# Altium PCB WPT Round 2.1 RX Layout.PcbDoc
Units mm, origin at the board's own origin, x right, y up, seen from the top; angles counter-clockwise.
Board outline 107.25 x 80 mm, 4 copper layers (Top Layer, Ground 1, Ground 2, Bottom Layer), stack 0.603 mm thick; 98 components, 38 nets, 226 pads, 196 vias.
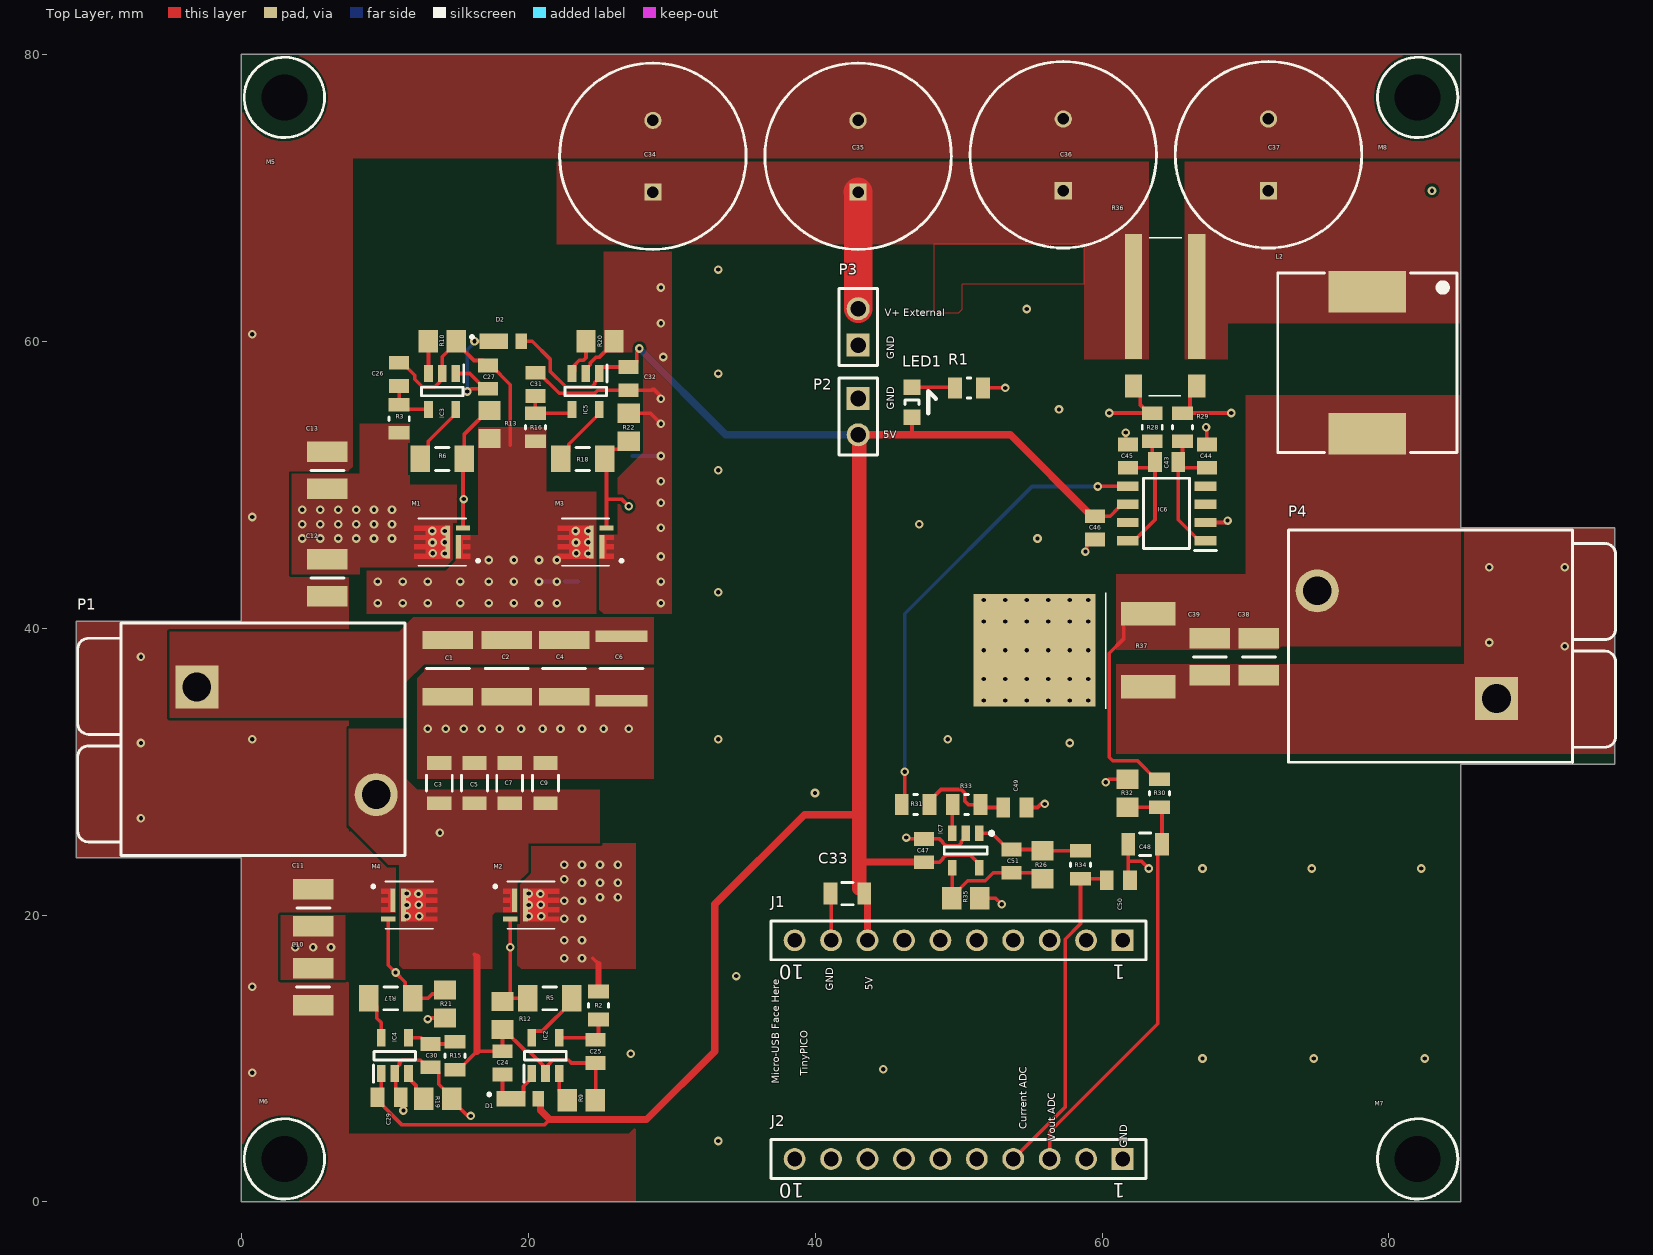
[diagram p0: Top Layer view]
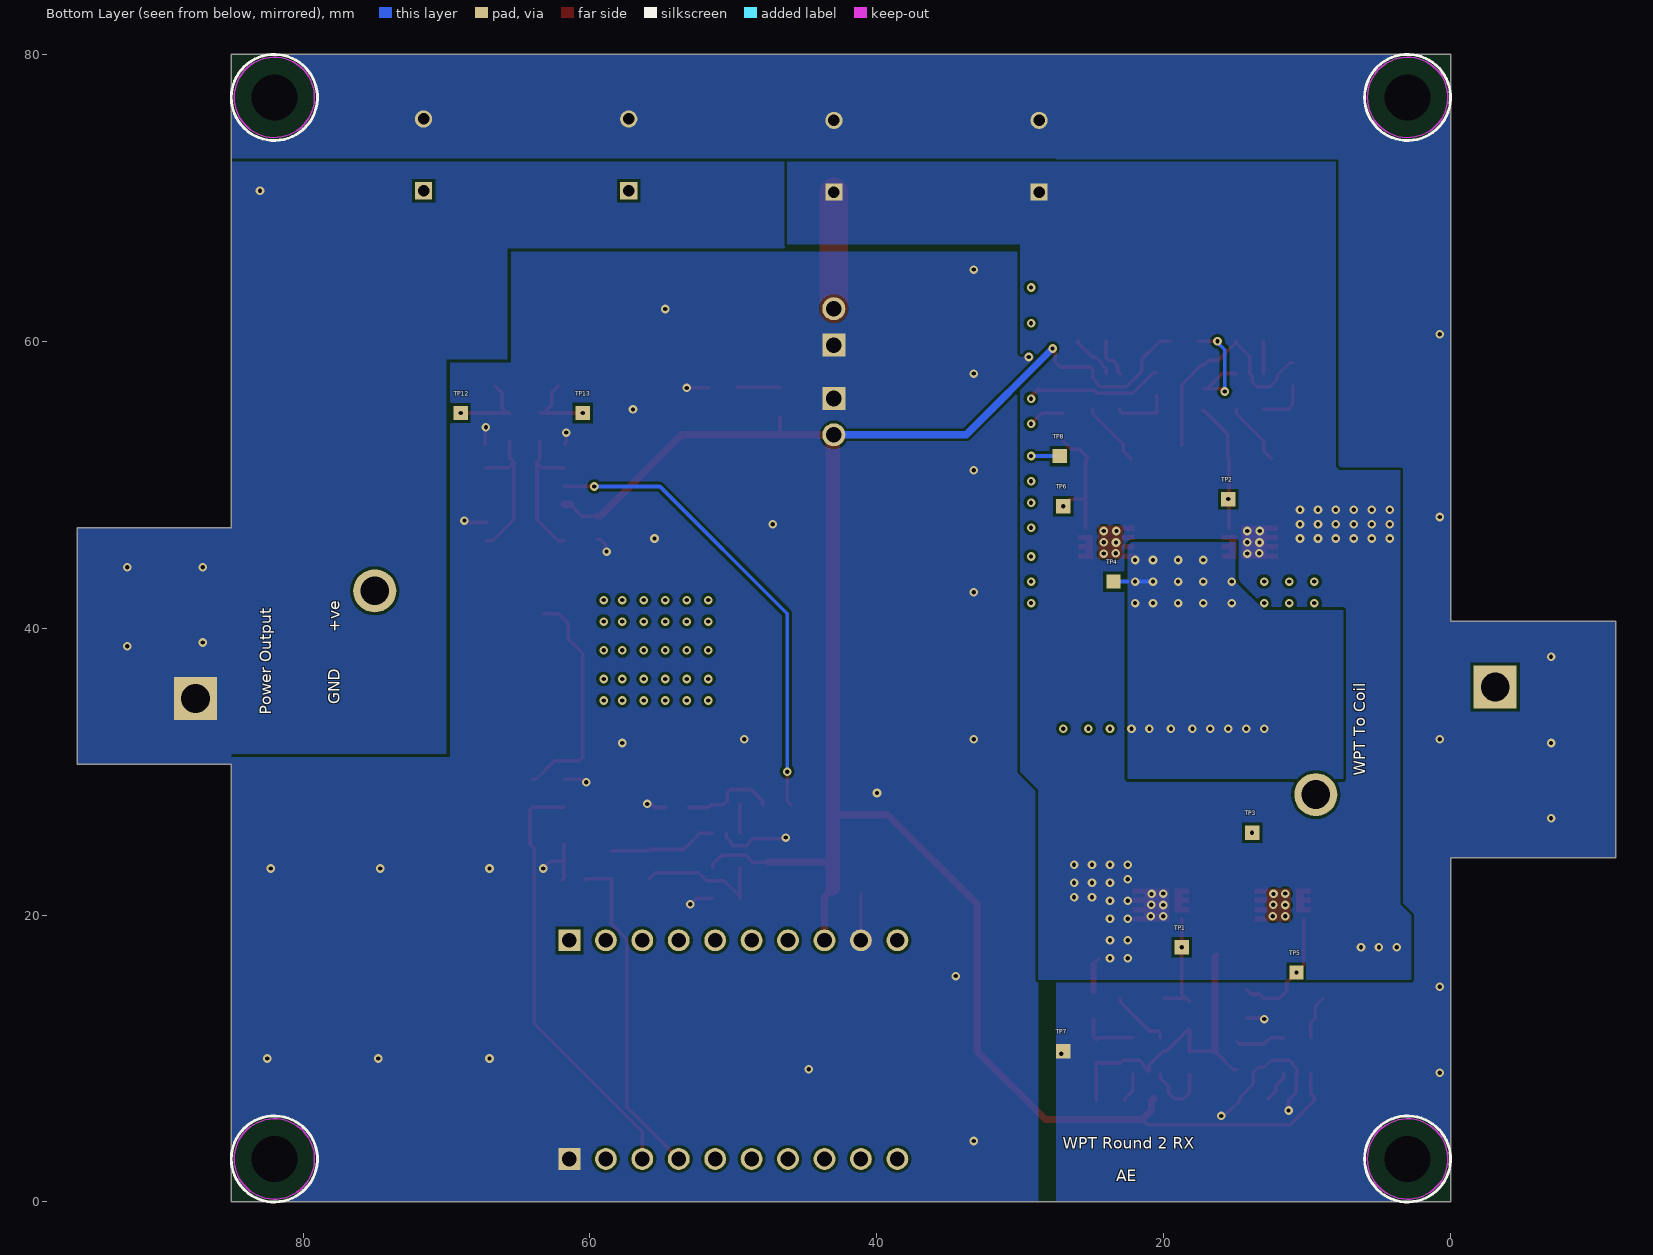
[diagram p1: Bottom Layer view, seen from below]
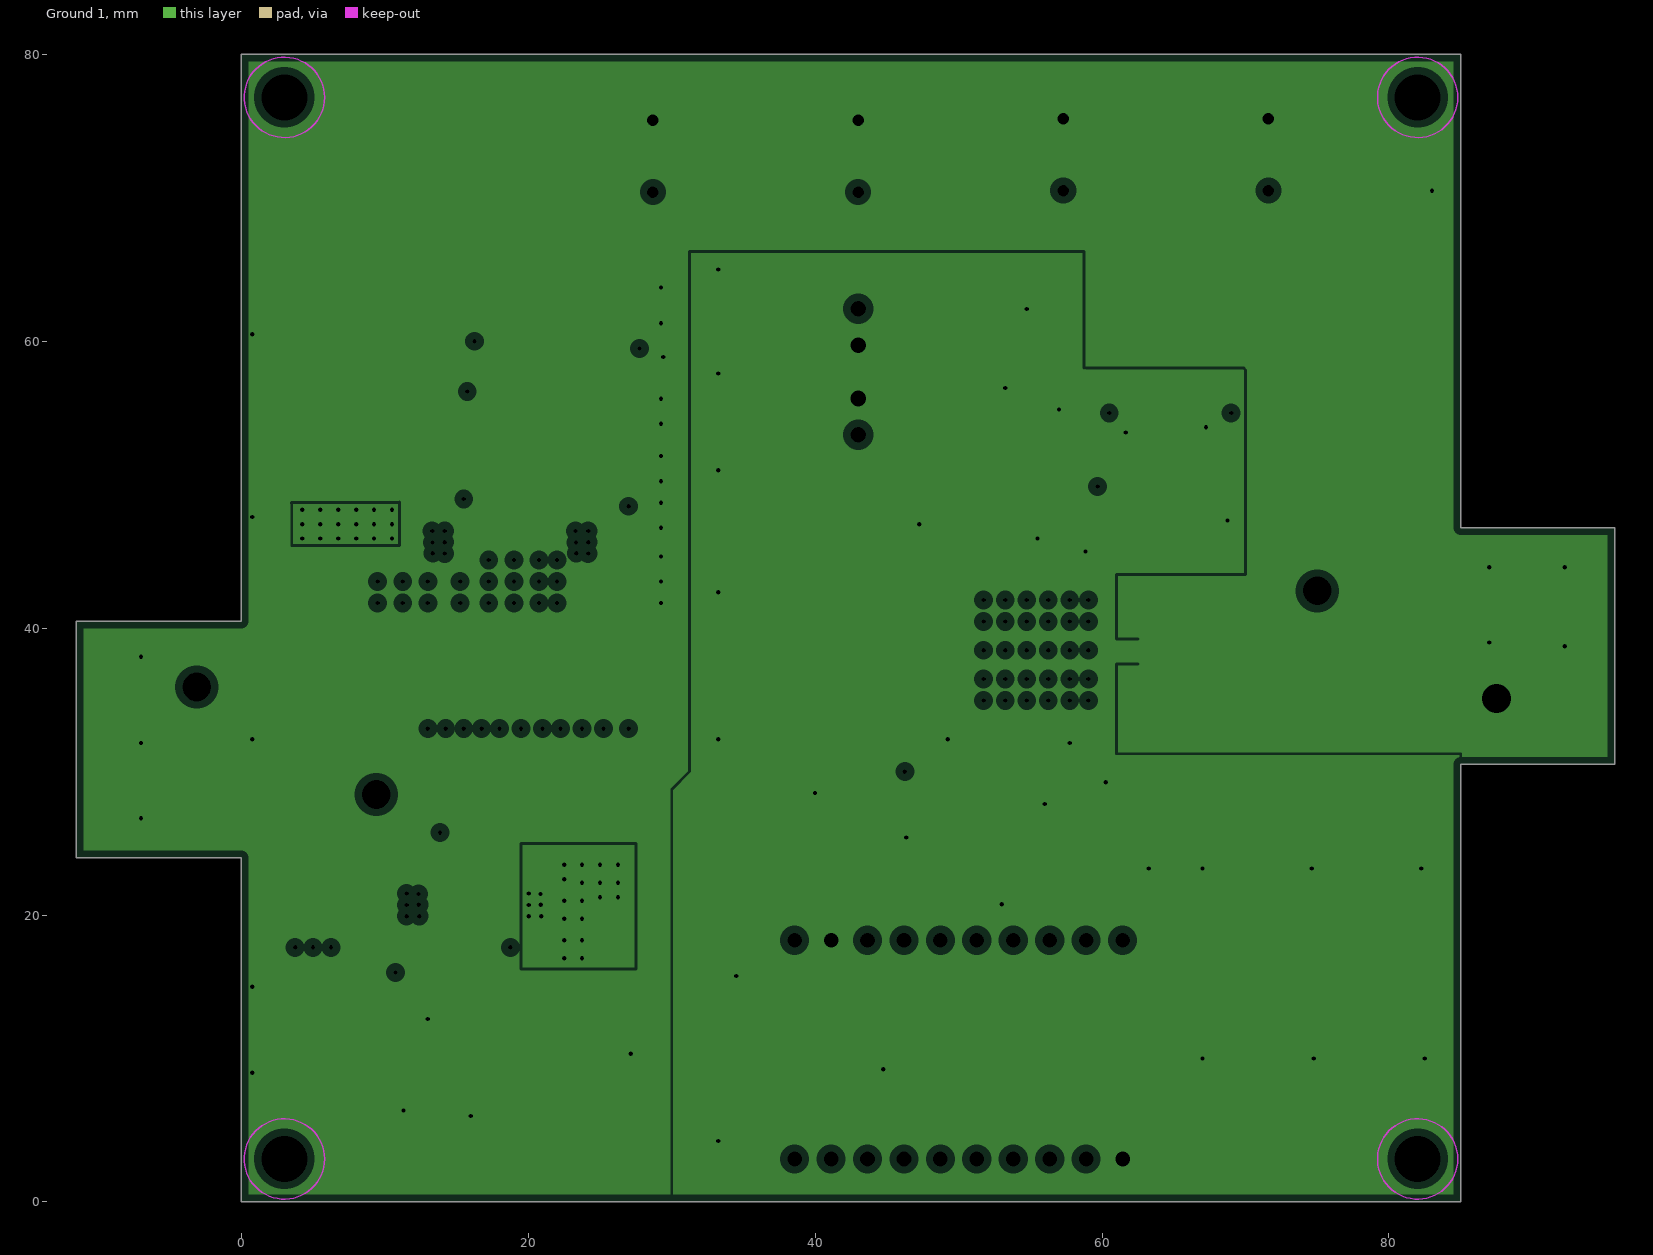
[diagram p2: Ground 1, clearances drawn from the general rule]
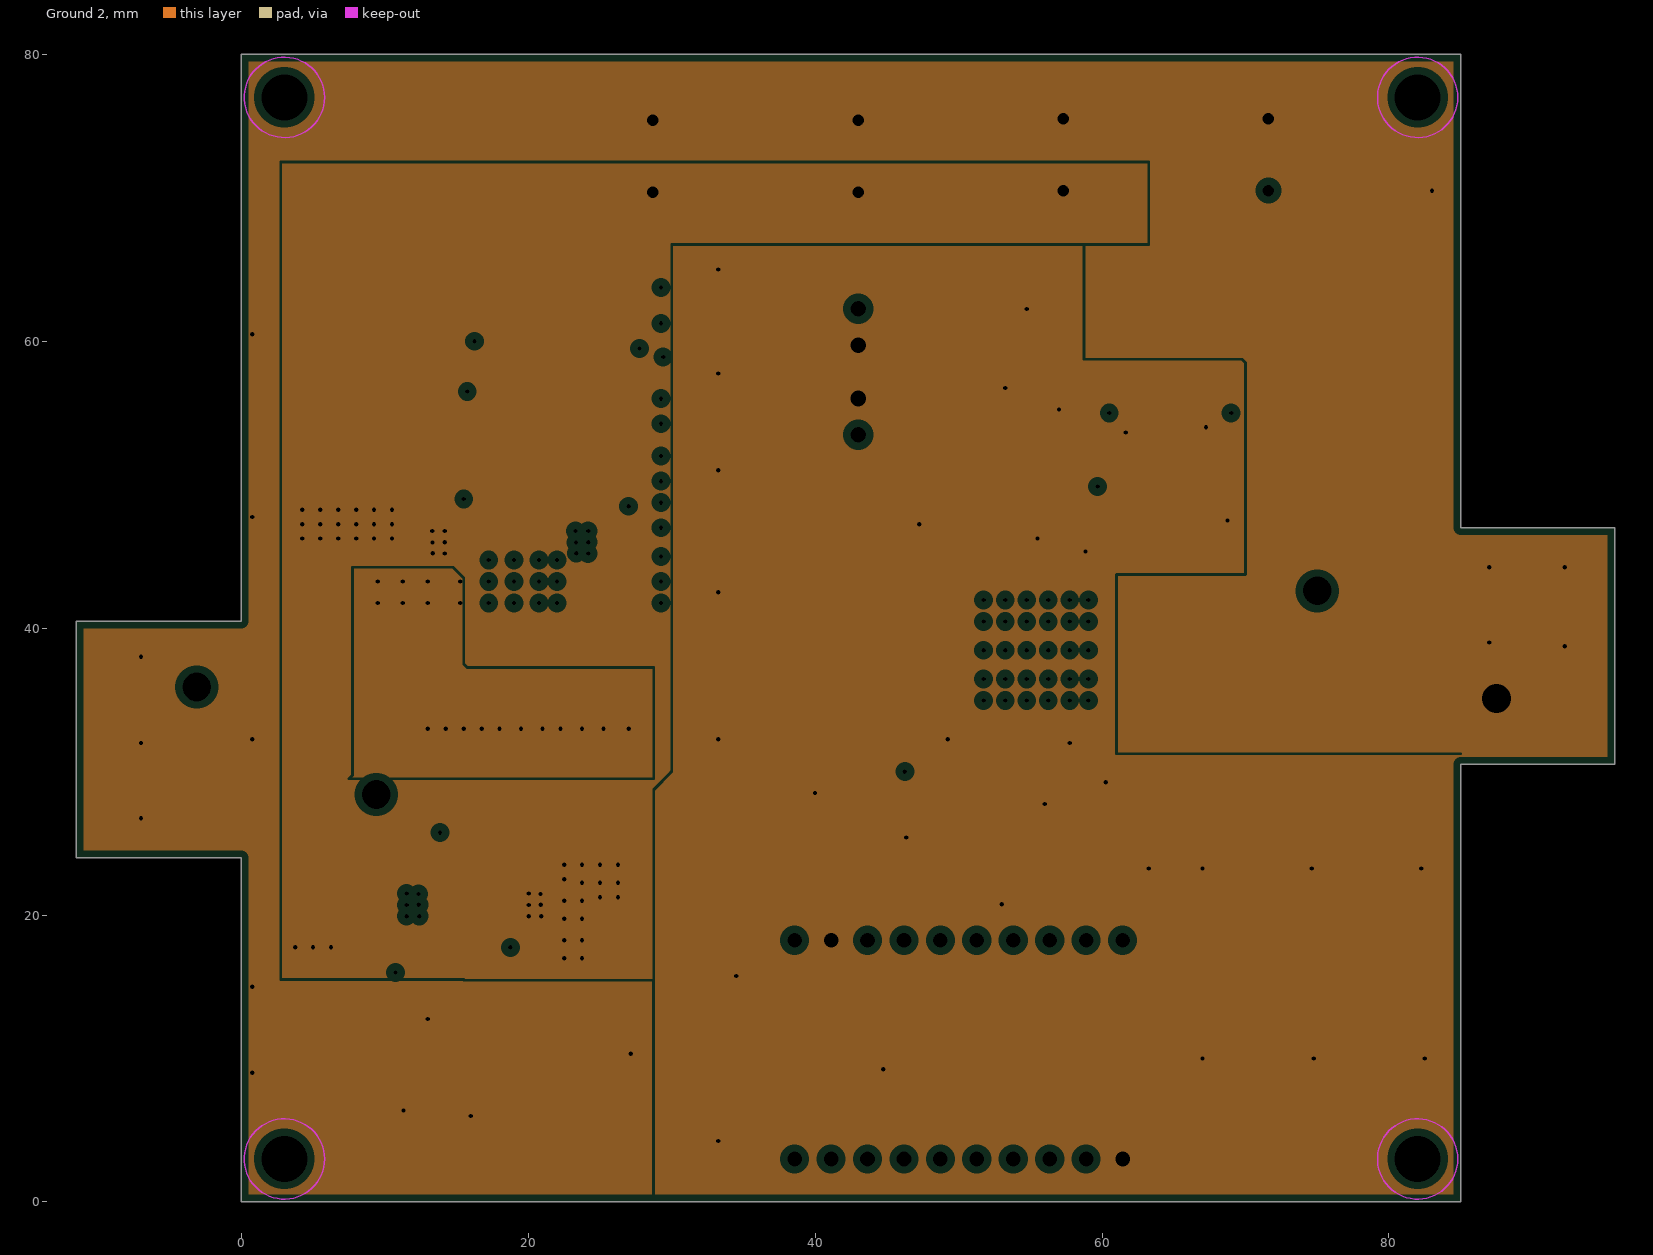
[diagram p3: Ground 2, clearances drawn from the general rule]
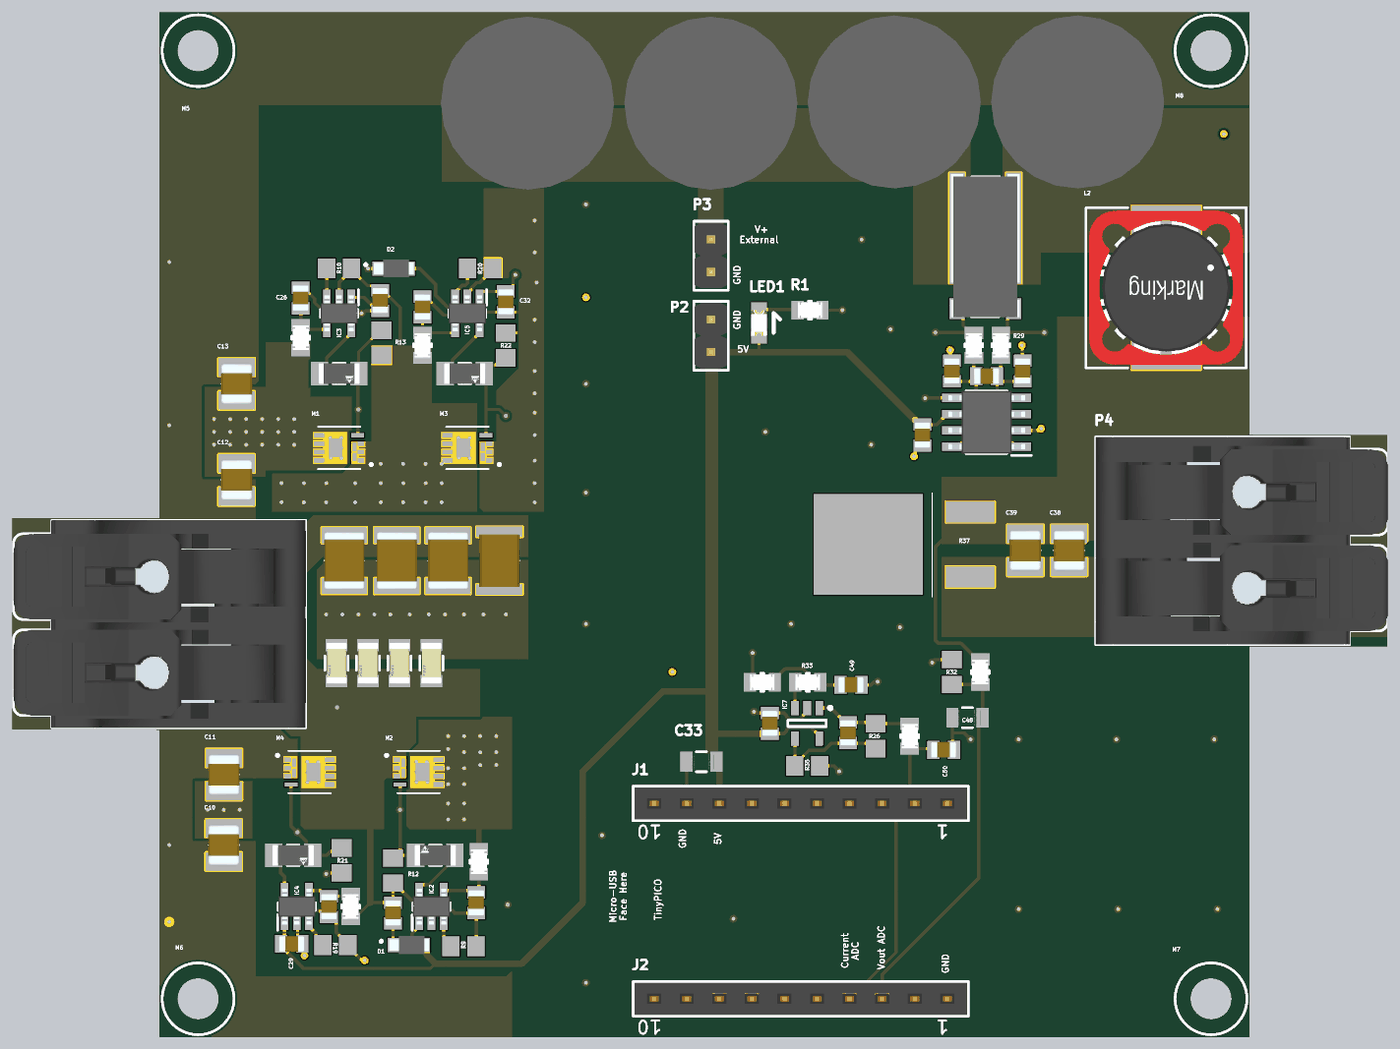
[diagram p4: 3D render of the assembled board from above, using the file's embedded part models]

## Layer stack, top to bottom
Top Solder: solder mask 0.0102, Solder Resist, Dk 3.5
Top Layer: signal copper 0.0356
Dielectric 2: prepreg 0.0711, PP-006, Dk 4.1
Ground 1: plane copper 0.035, net (Multiple Nets)
Dielectric 1: dielectric 0.32, FR-4, Dk 4.8
Ground 2: plane copper 0.035, net (Multiple Nets)
Dielectric 3: prepreg 0.0711, PP-006, Dk 4.1
Bottom Layer: signal copper 0.0356
Bottom Solder: solder mask 0.0102, Solder Resist, Dk 3.5

## Board outline
0,40.5 -11.5,40.5 -11.5,24 0,24 0,0 85,0 85,30.5 95.75,30.5 95.75,47 85,47 85,80 0,80

## Design rules (kind name [scope] priority, off if disabled: settings)
Clearance [All] p1: gap=0.2 ignorepadtopadclearanceinfootprint=TRUE
Height [All] p1: minheight=0 maxheight=50 prefheight=12.7
HoleSize [All] p1: absolutevalues=TRUE maxlimit=10 minlimit=0.025 maxpercent=80.000 minpercent=20.000
MinimumSolderMaskSliver [All] p1: minsoldermaskwidth=0.1
PlaneClearance [All] p1: clearance=0.508
PlaneConnect [All] p1: planeconnectstyle=Direct reliefexpansion=0.508 reliefentries=4 reliefconductorwidth=0.254 reliefairgap=0.254
PolygonConnect [All] p1: connectstyle=Direct reliefconductorwidth=0.254 reliefentries=4 polygonreliefangle="90 Angle" airgapwidth=0.254
RoutingVias [All] p1: holewidth=0.3 width=0.6 viastyle="Through Hole" minholewidth=0.05 minwidth=0.1 maxholewidth=0.711 maxwidth=1.27
SilkToSilkClearance [All] p1: silktosilkclearance=0.1
SilkToSolderMaskClearance [IsPad] p1: minsilkscreentomaskgap=0.1 clearancetoexposedcopper=TRUE
SolderMaskExpansion [All] p1: expansion=0.102 istentingtop=FALSE
Width [All] p1: maxlimit=10 minlimit=0.254 preferedwidth=0.254
23 further rules are at their usual default settings.

## Components (designator, comment, footprint, x,y, rotation, side; value= is the part's Value field where it differs from the comment)
C1 "100nF/250V" CAPC4532X220N 14.4,37.2 r270 top
C2 "100nF/250V" CAPC4532X220N 18.5,37.2 r270 top
C3 "470pF/200V" FP-C1206C-EB-MFG 13.8,29.2 r90 top value="470 pF"
C4 "100nF/250V" CAPC4532X220N 22.5,37.2 r270 top
C5 "470pF/200V" FP-C1206C-EB-MFG 16.254,29.2 r90 top value="470 pF"
C6 "47nF/250V" CAPC4532X350N 26.5,37.2 r270 top
C7 "470pF/200V" FP-C1206C-EB-MFG 18.709,29.2 r90 top value="470 pF"
C9 "470pF/200V" FP-C1206C-EB-MFG 21.2,29.2 r90 top value="470 pF"
C10 "4.7uF/100VDC" CAPC3225X280N 5,15 r90 top
C11 "4.7uF/100VDC" CAPC3225X280N 5.02,20.5 r270 top
C12 "4.7uF/100VDC" CAPC3225X280N 6,43.5 r90 top
C13 "4.7uF/100VDC" CAPC3225X280N 6,51 r270 top
C24 "100nF/50V" CAPC2012X90N 18.2,9.7 r270 top
C25 "100pF" CAPC2012X70N 24.7,10.5 r90 top
C26 "100pF" CAPC2012X70N 11,57.7 r270 top
C27 "100nF/50V" CAPC2012X90N 17.2,57.5 r270 top
C29 "100nF/50V" CAPC2012X90N 10.3,7.3 r180 top
C30 "100pF" CAPC2012X70N 13.2,10.2 r90 top
C31 "100pF" CAPC2012X70N 20.5,57 r270 top
C32 "100nF/50V" CAPC2012X90N 27,57.4 r90 top
C33 "10nF/50V" "0805 Capacitor" 42.25,21.5 r0 top
C34 "1000uF/50V" CAPPRD500W62D1300H2650 28.687,70.4 r90 top
C35 "1000uF/50V" CAPPRD500W62D1300H2650 42.991,70.4 r90 top
C36 "1000uF/50V" CAPPRD500W62D1300H2650 57.296,70.5 r90 top
C37 "1000uF/50V" CAPPRD500W62D1300H2650 71.6,70.5 r90 top
C38 "4.7uF/50V" CAPC3225X280N 70.936,38 r90 top
C39 "4.7uF/50V" CAPC3225X280N 67.511,38 r90 top
C43 "1nF/50V" CAPC2012X90N 64.5,51.6 r180 top
C44 "1nF/50V" CAPC2012X90N 67.3,52 r270 top
C45 "1nF/50V" CAPC2012X90N 61.8,52 r270 top
C46 "100nF/50V" CAPC2012X90N 59.5,47 r90 top
C47 "100nF/50V" CAPC2012X90N 47.596,24.5 r270 top
C48 "10nF/50V" "0805 Capacitor" 63,24.938 r0 top
C49 "1nF/50V" CAPC2012X90N 53.924,27.5 r180 top
C50 "1nF/50V" CAPC2012X90N 61.144,22.43 r180 top
C51 "33pF/50V" CAPC2012X90N 53.679,23.76 r90 top
D1 "Schottky Diode" RB400VAM50TR 18.8,7.2 r270 top
D2 "Schottky Diode" RB400VAM50TR 17.6,60 r270 top
IC2 "Gate Drive" SOT95P280X145-5N 21.2,10.2 r90 top
IC3 "Gate Drive" SOT95P280X145-5N 14,56.5 r270 top
IC4 "Gate Drive" SOT95P280X145-5N 10.7,10.2 r90 top
IC5 "Gate Drive" SOT95P280X145-5N 24,56.5 r270 top
IC6 "Amplifier" SOIC127P600X175-8N 64.5,48 r180 top
IC7 "Op-Amp" ADI-RJ-5_N 50.5,24.5 r270 top
J1 "61301011821" 61301011821 50,18.24 r180 top
J2 "61301011821" 61301011821 50,3 r180 top
L2 "10A" WE-PF_1280 78.5,58.5 r180 top
LED1 "Green LED" 0805_A 46.75,55.75 r270 top
M1 "Mosfet" TRANS_BSZ037N06LS5ATMA1 14,46 r180 top
M2 "Mosfet" TRANS_BSZ037N06LS5ATMA1 20.2,20.7 r0 top
M3 "Mosfet" TRANS_BSZ037N06LS5ATMA1 24,46 r180 top
M4 "Mosfet" TRANS_BSZ037N06LS5ATMA1 11.7,20.7 r0 top
M5 "M3 Mounting Hole" "M3 Hole" 3,77 r0 top
M6 "M3 Mounting Hole" "M3 Hole" 3,3 r0 top
M7 "M3 Mounting Hole" "M3 Hole" 82,3 r0 top
M8 "M3 Mounting Hole" "M3 Hole" 82,77 r0 top
P1 "To Coil" 691404910002B 0,32.25 r270 top
P2 "61300211121" 61300211121 43,54.75 r270 top
P3 "61300211121" 61300211121 43,61 r90 top
P4 "System Output" 691404910002B 84.4,38.75 r90 top
R1 "1K0O" FP-CRCW0805-e3-MFG 50.725,56.75 r0 top
R2 "1K" FP-CRCW0805-e3-MFG 24.9,13.7 r90 top
R3 "1K" FP-CRCW0805-e3-MFG 11,54.6 r270 top
R5 "10R" FP-CRCW1206-e3-IPC_A 21.5,14.2 r180 top
R6 "10R" FP-CRCW1206-e3-IPC_A 14,51.8 r0 top
R9 "10k Ohm" "0805 RESISTOR" 23.7,7.1 r180 top
R10 "10k Ohm" "0805 RESISTOR" 14,60 r180 top
R12 "10k Ohm" "0805 RESISTOR" 18.2,13 r270 top
R13 "10k Ohm" "0805 RESISTOR" 17.3,54.2 r270 top
R15 "1K" FP-CRCW0805-e3-MFG 14.9,10.2 r270 top
R16 "1K" FP-CRCW0805-e3-MFG 20.5,54 r270 top
R17 "10R" FP-CRCW1206-e3-IPC_A 10.417,14.2 r0 top
R18 "10R" FP-CRCW1206-e3-IPC_A 23.8,51.8 r0 top
R19 "10k Ohm" "0805 RESISTOR" 13.7,7.2 r180 top
R20 "10k Ohm" "0805 RESISTOR" 25,60 r180 top
R21 "10k Ohm" "0805 RESISTOR" 14.2,13.8 r270 top
R22 "10k Ohm" "0805 RESISTOR" 27,54 r90 top
R26 "15K" "0805 Resistor" 55.85,23.5 r90 top
R28 "470R" FP-CRCW0805-e3-MFG 63.5,54 r90 top
R29 "470R" FP-CRCW0805-e3-MFG 65.604,54 r90 top
R30 "1M ohm" FP-CRCW0805-e3-MFG 64,28.5 r90 top
R31 "1K" FP-CRCW0805-e3-MFG 47,27.704 r180 top
R32 "56K" "0805 RESISTOR" 61.78,28.5 r270 top
R33 "6K8R" FP-CRCW0805-e3-MFG 50.554,27.704 r0 top
R34 "100R" FP-CRCW0805-e3-MFG 58.5,23.5 r90 top
R35 "10k Ohm" "0805 RESISTOR" 50.5,21.18 r0 top
R36 "0R005 5W" FC4L110R005FER 64.4,60 r180 top
R37 "300 Ohm / 25W" PWR163S253000FE 59.247,38.46 r90 top
TP1 "TP" "Test Point" 18.75,17.75 r180 bottom
TP2 "TP" "Test Point" 15.5,49 r180 bottom
TP3 "TP" "Test Point" 13.842,25.746 r180 bottom
TP4 "TP" "Test Point" 23.5,43.25 r180 bottom
TP5 "TP" "Test Point" 10.75,16 r180 bottom
TP6 "TP" "Test Point" 27,48.5 r180 bottom
TP7 "TP" "Test Point" 27,10.5 r180 bottom
TP8 "TP" "Test Point" 27.25,52 r180 bottom
TP12 "TP" "Test Point" 69,55 r90 bottom
TP13 "TP" "Test Point" 60.5,55 r90 bottom

## Footprints (in the part's own frame and the unit in brackets; to place one, negate y for a bottom-side part, rotate by r counter-clockwise, add the part's x,y. Pads: shape width x height; smd on the part's side, far side on the other; paste and mask are expansions set on the pad)
"0805 Capacitor" [mm]
  rect 0.956x1.556 smd paste+0 mask+0: 1(-1.175,0) 2(1.175,0)
  silkscreen extent -0.4,-0.78 0.4,0.78, body extent -2.15,-1.28 2.15,1.28, height 0.25
"0805 RESISTOR" [mm] "Chip Resistor, 2-Leads, Body 2.00x1.25mm, IPC Low Density"
  rect 1.35x1.55 smd: 1(-0.975,0) 2(0.975,0)
  body extent -1.1,-0.72 1.1,0.72, height 0.7
"0805 Resistor" [mm] "Chip Resistor, 2-Leads, Body 2.00x1.25mm, IPC Low Density"
  rect 1.35x1.55 smd: 1(-0.975,0) 2(0.975,0)
  body extent -1.1,-0.72 1.1,0.72, height 0.7
0805_A [mm] "Chip LED, 2-Leads, Body 2.0x1.3mm, IPC Medium Density"
  rect 1.1x1.2 smd: 1(-1.05,0) 2(1.05,0)
  silkscreen extent -0.76,-0.5 0.76,1.65, body extent -1,-0.62 1,0.63, height 0.68
61300211121 [mm] "Pin Header, pitch 2.54 mm, THT, Vertical, single row, 2p"
  rect 1.6x1.6 hole 1.1: 1(-1.27,0)
  round 1.6 hole 1.1: 2(1.27,0)
  silkscreen extent -2.69,-1.35 2.69,1.35, body extent -2.54,-1.27 2.54,1.27, height 8.57
61301011821 [mm] "Socket Header, Pitch 2.54 mm, THT, Vertical, single row, 10p"
  rect 1.52x1.52 hole 1.02: 1(-11.43,0)
  round 1.52 hole 1.02: 2(-8.89,0) 3(-6.35,0) 4(-3.81,0) 5(-1.27,0) 6(1.27,0) 7(3.81,0) 8(6.35,0) 9(8.89,0) 10(11.43,0)
  silkscreen extent -13.08,-1.35 13.08,1.35, body extent -12.95,-1.25 12.95,1.25, height 8.55
691404910002B [mm] "7.50 mm Screwless Clamp Power Connector, 2p"
  rect 3x3 hole 2: 1(-3.65,-3.1)
  round 3 hole 2: 2(3.85,9.4)
  silkscreen extent -8.1,-11.4 8.1,11.4, body extent -8.1,-11.4 8.1,11.4, height 24.16
ADI-RJ-5_N [mm] "SOT-23, 5-Leads, Body 2.9x1.6mm, Pitch 0.95mm, IPC Medium Density"
  rect 1.1x0.6 smd: 1(-1.2,0.95) 2(-1.2,0) 3(-1.2,-0.95) 4(1.2,-0.95) 5(1.2,0.95)
  silkscreen extent -1.32,-1.5 0.25,1.93, body extent -0.85,-1.5 0.85,1.5, height 1.45
CAPC2012X70N [mm]
  rect 0.96x1.39 smd: 1(-0.81,0) 2(0.81,0)
  body extent -1,-0.63 1,0.63, height 0.7
CAPC2012X90N [mm]
  rect 0.96x1.39 smd: 1(-0.81,0) 2(0.81,0)
  body extent -1,-0.63 1,0.63, height 0.9
CAPC3225X280N [mm]
  rect 1.43x2.82 smd: 1(-1.29,0) 2(1.29,0)
  silkscreen extent 0,-1.15 0,1.15, body extent -1.6,-1.25 1.6,1.25, height 2.8
CAPC4532X220N [mm]
  rect 1.25x3.52 smd: 1(-1.98,0) 2(1.98,0)
  silkscreen extent 0,-1.5 0,1.5, body extent -2.25,-1.6 2.25,1.6, height 2.2
CAPC4532X350N [mm]
  rect 0.81x3.61 smd: 1(-2.25,0) 2(2.25,0)
  silkscreen extent 0,-1.5 0,1.5, body extent -2.05,-1.57 2.05,1.57, height 3.46
CAPPRD500W62D1300H2650 [mm]
  rect 1.2x1.2 hole 0.8: 1(0,0)
  round 1.2 hole 0.8: 2(5,0)
  silkscreen extent -4,-6.5 9,6.5, body extent -4.25,-6.75 9.25,6.75, height 26.5
FC4L110R005FER [mm]
  rect 1.2x8.7 smd: 1(-2.2,-3.125) 2(2.2,-3.125)
  rect 1.2x1.6 smd: 3(2.2,3.125) 4(-2.2,3.125)
  silkscreen extent -1.15,-7.2 1.15,3.8, body extent -2.68,-7.35 2.68,3.8, height 0.8
FP-C1206C-EB-MFG [mm]
  rect 0.95x1.7 smd paste+0 mask+0: 1(-1.4,0) 2(1.4,0)
  silkscreen extent -0.55,-0.9 0.55,0.9, body extent -2,-1 2,1, height 0.25
FP-CRCW0805-e3-MFG [mm]
  rect 0.95x1.45 smd paste+0 mask+0: 1(-0.975,0) 2(0.975,0)
  silkscreen extent -0.13,-0.7 0.13,0.7, body extent -1.55,-0.82 1.55,0.82, height 0.25
FP-CRCW1206-e3-IPC_A [mm]
  rect 1.356x1.858 smd paste+0 mask+0: 1(-1.526,0) 2(1.526,0)
  silkscreen extent -0.47,-0.8 0.47,0.8, body extent -2.7,-1.43 2.7,1.43, height 0.25
"M3 Hole" [mm]
  round 0 hole 3.2 unplated mask+0.1: 1(0,0)
  Keep-Out Layer circle w0.1: c0,0 r2.8
  silkscreen extent -2.8,-2.8 2.8,2.8
PWR163S253000FE [mm]
  rect 1.62x3.81 smd: 1(-2.54,-3.97) 2(2.54,-3.97)
  rect 7.87x8.51 smd: 3(0,3.97)
  silkscreen extent -4.07,-1 4,-1
RB400VAM50TR [mm]
  rect 1.1x2 smd: 1(0,0)
  rect 1.1x0.8 smd: 2(0,1.9)
  silkscreen extent -0.4,-1.62 -0.2,-1.43, body extent -0.7,-0.89 0.7,2.22, height 0.9
SOIC127P600X175-8N [mm]
  rect 1.525x0.65 smd: 1(-2.712,1.905) 2(-2.712,0.635) 3(-2.712,-0.635) 4(-2.712,-1.905) 5(2.712,-1.905) 6(2.712,-0.635) 7(2.712,0.635) 8(2.712,1.905)
  silkscreen extent -3.47,-2.45 1.6,2.58, body extent -3,-2.45 3,2.45, height 1.75
SOT95P280X145-5N [mm]
  rect 1.2x0.6 smd: 1(-1.25,0.95) 2(-1.25,0) 3(-1.25,-0.95) 4(1.25,-0.95) 5(1.25,0.95)
  silkscreen extent -1.85,-1.45 0.3,1.5, body extent -1.4,-1.45 1.4,1.45, height 1.45
"Test Point" [mm]
  rect 1x1 smd: 1(0,0)
TRANS_BSZ037N06LS5ATMA1 [mm]
  rect 0.34x1.64 smd paste-2 mask+0: 1-2-3(-1.15,0.325)
  rect 1x0.34 smd: 4(-1.45,-0.975)
  rect 0.34x2.29 smd paste-2 mask+0: 5-6-7-8(-0.39,0)
  Top Layer region: 1.95,0.805 1.15,0.805 1.15,0.495 1.95,0.495 1.95,0.155 1.15,0.155 1.15,-0.155 1.95,-0.155 1.95,-0.495 1.15,-0.495 1.15,-0.805 1.95,-0.805 1.95,-1.145 -0.56,-1.145 -0.56,1.145 1.95,1.145
  Top Layer region: -0.95,-0.495 -1.95,-0.495 -1.95,-0.155 -1.45,-0.155 -1.45,0.155 -1.95,0.155 -1.95,0.495 -1.45,0.495 -1.45,0.805 -1.95,0.805 -1.95,1.145 -0.95,1.145
  silkscreen extent -2.6,-1.65 1.65,1.65
WE-PF_1280 [mm] "SMD EMI Suppression Power  Ferrite, body 12x12mm"
  rect 5.4x2.9 smd: 1(0,-4.95) 2(0,4.95)
  silkscreen extent -6.25,-6.25 6.25,6.25, body extent -6,-6 6,6, height 8

## Part data
C1 C2 C4: library part C1812C104JAGACAUTO, Manufacturer_Name=Kemet, Supplier Part Number 1=80-C1812C104JAGAUTO, Datasheet Link=https://api.kemet.com/component-edge/download/datasheet/C1812C104JAGACAUTO.pdf, Height=2.2mm, Manufacturer_Part_Number=C1812C104JAGACAUTO, Supplier 1=Mouser
C3 C5 C7 C9: library part C1206C471K2GACTU, "CAP CER 470PF 200V 10% NP0 1206", Capacitance="470 pF", Manufacturer=KEMET, Package=C1206C-EB, Temperature="-55°C to +150°C", Temperature Characteristic=C0G, Temperature Coefficient=15%, Temperature Range High=+150°C, Temperature Range Low=-55°C, Tolerance=0.1, Voltage Rating="200 V", Automotive=Yes, Automotive Grade="Grade 0", Category=Cap, ComponentLink2Description=Datasheet, ComponentLink2URL=https://content.kemet.com/datasheets/KEM_C1007_X8R_ULTRA_150C_SMD.pdf, Device Class L1="Passive Components", Device Class L2=Capacitors, Device Class L3="Ceramic Capacitors", Digikey Description="CAP CER 470PF 200V 10% NP0 1206", Height=0.88mm, Ipc Land Pattern Name=CAPC320160X78, Lead Free=Yes, Manufacturer Part Number=C1206C471K2GACTU, Material=Ceramic, Mouser Description="Multilayer Ceramic Capacitors MLCC - SMD/SMT 200volts 470pF C0G 10%", Octopart=https://octopart.com/c1206c471k2gactu-kemet-3658280, RoHS=TRUE
C6: library part C4532C0G2E473J320KA, "Capacitor / 47nF/250V  / C0G", Manufacturer_Name=TDK, Supplier Part Number 1=810-C4532C0G2E473J, Datasheet Link=https://product.tdk.com/info/en/catalog/datasheets/mlcc_commercial_midvoltage_en.pdf, Height=3.5mm, Manufacturer_Part_Number=C4532C0G2E473J320KA, Supplier 1=Mouser
C10 C11 C12 C13: library part CNC6P1X7R2A475K250AE, Manufacturer_Name=TDK, Mouser2 Part Number=810-CNC6P1X7R2A475K2, Datasheet Link=https://componentsearchengine.com//CNC6P1X7R2A475K250AE.pdf, Height=2.8mm, Manufacturer_Part_Number=CNC6P1X7R2A475K250AE, Mouser2 Price/Stock=https://www.mouser.com/Search/Refine.aspx?Keyword=810-CNC6P1X7R2A475K2, Supplier 1=Mouser, Supplier Part Number 1=810-CNC6P1X7R2A475K2
C24 C27 C29 C32: library part 885012207098, "Capacitor 100nF/50V", Manufacturer_Name="Wurth Elektronik", Mouser2 Part Number=710-885012207098, Datasheet Link=https://componentsearchengine.com//885012207098.pdf, Height=0.9mm, Manufacturer_Part_Number=885012207098, Mouser2 Price/Stock=https://www.mouser.com/Search/Refine.aspx?Keyword=710-885012207098, Supplier 1=Mouser, Supplier Part Number 1=710-885012207098
C25 C26 C30 C31: library part 885012007057, "Capacitor 100pF", Manufacturer_Name="Wurth Elektronik", Supplier Part Number 1=710-885012007057, Datasheet Link=https://katalog.we-online.com/pbs/datasheet/885012007057.pdf, Height=0.7mm, Manufacturer_Part_Number=885012007057, Supplier 1=Mouser
C33 C48: library part 885012207092, Supplier Part Number 1=710-885012207092, Supplier 1=Mouser
C34 C35 C36 C37: library part ESH108M050AL4AA, "Capacitor 1000uF", Supplier Part Number 1=80-ESH108M050AL4AA, Supplier 1=Mouser
C38 C39: library part 885012209048, "Capacitor 4.7uF/50V", Manufacturer_Name="Wurth Elektronik", Supplier Part Number 1=710-885012209048, Datasheet Link=https://katalog.we-online.com/pbs/datasheet/885012209048.pdf, Height=2.8mm, Manufacturer_Part_Number=885012209048, Supplier 1=Mouser
C43 C44 C45 C49 C50: library part 885012207086, Manufacturer_Name="Wurth Elektronik", Supplier Part Number 1=710-885012207086, Datasheet Link=https://katalog.we-online.com/pbs/datasheet/885012207086.pdf, Height=0.9mm, Manufacturer_Part_Number=885012207086, Supplier 1=Mouser
C46 C47: library part 885012207098, Manufacturer_Name="Wurth Elektronik", Supplier Part Number 1=710-885012207098, Height=0.9mm, Supplier 1=Mouser
C51: library part C0805C330J5GACTU, "Capacitor 33pF/50V", Manufacturer_Name=Kemet, Supplier Part Number 1=80-C0805C330J5G, Manufacturer_Part_Number=C0805C330J5GACTU, Supplier 1=Mouser
D1 D2: library part RB400VAM-50TR, Manufacturer_Name="ROHM Semiconductor", Mouser2 Part Number=755-RB400VAM-50TR, Datasheet Link=https://componentsearchengine.com//RB400VAM-50TR.pdf, Height=0.8mm, Manufacturer_Part_Number=RB400VAM-50TR, Mouser2 Price/Stock=https://www.mouser.com/Search/Refine.aspx?Keyword=755-RB400VAM-50TR, Supplier 1=Mouser, Supplier Part Number 1=755-RB400VAM-50TR
IC2 IC3 IC4 IC5: library part IR1161LTRPBF, "Gate Driver IC", Manufacturer_Name=Infineon, Supplier Part Number 1=942-IR1161LTRPBF, Height=1.45mm, Manufacturer_Part_Number=IR1161LTRPBF, Supplier 1=Mouser
IC6: library part AD8215YRZ, "Integrated Circuit Amplifier", Manufacturer_Name="Analog Devices", Supplier Part Number 1=584-AD8215YRZ, Datasheet Link=http://www.analog.com/static/imported-files/data_sheets/AD8215.pdf, Height=1.75mm, Manufacturer_Part_Number=AD8215YRZ, Supplier 1=Mouser
IC7: library part AD8031ARTZ-REEL7, "Single Channel RRIO Operational Amplifier, 80 MHz BW, 35 V/us SR, Industrial, 5-pin SOT23 (RJ-5), Reel", Amplifiers Per Package=1, Generic Part Number=AD8031, Input Bias Current=450nA, Input Offset Voltage=1mV, Manufacturer="Analog Devices", Supplier Part Number 1=584-AD8031ARTZ-R7, Code_JEDEC=MO-178-AA, ComponentLink1Description="Manufacturer URL", ComponentLink1URL=http://www.analog.com/en/index.html, ComponentLink2Description=Datasheet, ComponentLink2URL=http://www.analog.com/static/imported-files/data_sheets/AD8031_8032.pdf, ComponentLink3Description="Package Specification", ComponentLink3URL=http://www.analog.com/static/imported-files/packages/PKG_PDF/SOT-23(RJ)/RJ_5.pdf, ComponentLink4Description="Reference Circuit", ComponentLink4URL=http://www.analog.com/en/all-operational-amplifiers-op-amps/operational-amplifiers-op-amps/ad8031/products/product.html#product-recommendations, DatasheetVersion="Rev. D", Iq/Amp=900uA, Mounting Technology="Surface Mount", PackageDescription="5-Pin Small Outline Transistor Package, Body 2.9 x 1.6 mm, Pitch 0.95 mm", PackageReference=RJ-5, PackageVersion=121608-A, Packing=Reel, PartNumber=AD8031ARTZ-REEL7, RevisionNote="Reference Circuit URL fixed", Slew Rate=35V/us, Small Signal Bandwidth=80MHz, Supplier 1=Mouser, V Span Max=12V, V Span Min=2.7V
J1 J2: "WR-PHD Socket Header, THT, pitch 2.54mm, Single Row, Vertical, 10p", Contact Resistance=20mOhm, Manufacturer="Wurth Elektronik", Operating Temperature="-40 to +125degC", Rated Current=3A, Withstanding Voltage=500VAC, Working Voltage=250VAC, ComponentLink1Description=Manufacturer, ComponentLink1URL=http://www.we-online.de, ComponentLink2Description=Datasheet, ComponentLink2URL=https://www.we-online.com/catalog/datasheet/61301011821.pdf, Gender="Socket Header", Manufacturer Part Number=61301011821, Mounting Technology=THT, Orientation=Vertical, Packaging=Tray, Pin Number=10, Pitch=2.54mm, Published Date="May 2020", Row Number=Single
L2: library part 742792901, "SMD EMI Suppression Power Ferrite WE-PF, Z = 2900 Ohm", Supplier Part Number 1=710-742792901, ComponentLink1Description="Manufacturer Link", ComponentLink1URL=http://www.we-online.com, ComponentLink2Description=Datasheet, ComponentLink2URL=http://www.we-online.de/katalog/media/pdf/742792901.pdf, DatasheetVersion="ver 6, Apr-2007", Impedance="2900 Ohm", PackageDescription="Inductor, 2-Leads, Body 12.0 x 12.0 mm", PackageReference=WE-PF, PackageVersion=2007, Supplier 1=Mouser
LED1: library part 150080GS75000, "SMD mono-color Chip LED, WL-SMCW, Green", Color=Green, Manufacturer="Wuerth Elektronik", Supplier Part Number 1=710-150080GS75000, ComponentLink1Description="Manufacturer URL", ComponentLink1URL=http://www.we-online.com, ComponentLink2Description=Datasheet, ComponentLink2URL=http://katalog.we-online.com/led/datasheet/150080GS75000.pdf, PackageReference=0805_A, PartNumber=150080GS75000, Supplier 1=Mouser
M1 M2 M3 M4: library part BSZ070N08LS5ATMA1, "Further performance improvements with best-in-class OptiMOSâ„¢ 5 60V power MOSFET in high performance PQFN 3.3x3.3mm package / MOSFET Diode", Package="TSDSON-8 Infineon Technologies", Supplier Part Number 1=726-BSZ070N08LS5ATMA, Availability=Unavailable, MF="Infineon Technologies", MP=BSZ037N06LS5ATMA1, Price=None, SnapEDA_Link=https://www.snapeda.com/parts/BSZ037N06LS5ATMA1/Infineon%20Technologies/view-part/4422719/?ref=snap, Supplier 1=Mouser
M5 M6 M7 M8: library part M3_Mounting_hole
P1 P4: library part 691404910002B, "Serie 4049 B - 7.50mm Screwless Clamp Power Connector WR-TBL, 2 pin", Manufacturer="Wurth Elektronik", Operating Temperature=-40to105degC, Supplier Part Number 1=710-691404910002B, Datasheet URL=http://katalog.we-online.de/em/datasheet/6914049100xxB.pdf, Manufacturer URL=http://www.we-online.de, Mounting Technology=THT, Package Reference=691404910002B, Packaging=Box, Part Number=691404910002B, Pin Number=2, Pitch=7.50mm, Publisher=WurthElektronik, Supplier 1=Mouser
P2 P3: "WR-PHD Pin Header, THT, pitch 2.54mm, Single Row, Vertical, 2p", Contact Resistance=20mOhm, Manufacturer="Wurth Elektronik", Operating Temperature="-40 to +105degC", Rated Current=3A, Withstanding Voltage=500VAC, Working Voltage=250VAC, ComponentLink1Description=Manufacturer, ComponentLink1URL=http://www.we-online.de, ComponentLink2Description=Datasheet, ComponentLink2URL=https://www.we-online.com/catalog/datasheet/61300211121.pdf, Gender="Pin Header", Manufacturer Part Number=61300211121, Mounting Technology=THT, Orientation=Vertical, Packaging=Bag, Pin Number=2, Pitch=2.54mm, Published Date="May 2020", Row Number=Single
R1: library part CRCW08051K00FKEAC, "Resistor 1K0 Ohm", Supplier Part Number 1=71-CRCW0805-1.0K-E3, Number of Terminations=2, Supplier 1=Mouser
R2 R3 R15 R16 R31: library part CRCW08051K00FKEA, "Resistor 1k Ohm", Supplier Part Number 1=71-CRCW0805-1.0K-E3, Number of Terminations=2, Supplier 1=Mouser
R5 R6 R17 R18: library part CRCW120610R0FKEA, "RES Thick Film, 10Ω, 1%, 0.25W, 100ppm/°C, 1206 / MOSFET Gate Resistor 10Ohm", Case Code (Imperial)=1206, Case Code (Metric)=3216, Max Operating Temperature=155°C, Max Power Dissipation=250mW, Min Operating Temperature=-55°C, Package Quantity=10, Supplier Part Number 1=541-10.0FDKR-ND, Temperature Coefficient=100ppm/°C, Tolerance=1%, Voltage Rating=200V, Case/Package=1206, Composition="Thick Film", Contact Plating=Tin, Depth=1.6mm, Features="Automotive AEC-Q200", Height=0.55mm, Lead Free="Lead Free", Length=3.2mm, Military Standard=Not, Number of Pins=2, Number of Terminations=2, Packaging="Tape and Reel", Power Rating=250mW, Radiation Hardening=No, Resistance=10R, Supplier 1=Digi-Key, Termination=SMD/SMT, Voltage Rating (DC)=200V, Weight=0.000353oz, Width=0.063inch
R9 R10 R12 R13 R19 R20 R21 R22 R35: library part CRCW080510K0FKEA, "RES Thick Film, 10kΩ, 1%, 0.125W, 100ppm/°C, 0805 / 10k Ohm", Case Code (Imperial)=0805, Case Code (Metric)=2012, Max Operating Temperature=155°C, Min Operating Temperature=-55°C, Package Quantity=5000, Power Rating=125mW, Resistance=10kR, Supplier Part Number 1=71-CRCW0805-10K-E3, Temperature Coefficient=100ppm/°C, Tolerance=1%, Voltage Rating=150V, Case/Package=0805, Composition="Thick Film", Contact Plating=Tin, Depth=1.25mm, Height=0.45mm, Lead Free="Lead Free", Length=2mm, Military Standard=Not, Packaging="Tape and Reel", Radiation Hardening=No, Supplier 1=Mouser, Termination=SMD/SMT, Voltage Rating (DC)=150V, Weight=0.000194oz, Width=1.25mm
R26: library part ERA-6AED153V, "15K Ohm Resistor", Supplier Part Number 1=667-ERA-6AED153V, Supplier 1=Mouser
R28 R29: library part CRCW0805470RFKEB, "Resistor 470 Ohm", Supplier Part Number 1=71-CRCW0805470RFKEB, Number of Terminations=2, Supplier 1=Mouser
R30: library part CRCW08051M00FKEA, "RES Thick Film, 1MΩ, 1%, 0.125W, 100ppm/°C, 0805 / 1M Ohm Resistor", Case Code (Imperial)=0805, Case Code (Metric)=2012, Max Operating Temperature=155°C, Min Operating Temperature=-55°C, Package Quantity=5000, Power Rating=125mW, Resistance=1MR, Supplier Part Number 1=71-CRCW08051M00FKEAH, Temperature Coefficient=100ppm/°C, Tolerance=1%, Voltage Rating=150V, Case/Package=0805, Composition="Thick Film", Contact Plating=Tin, Depth=1.25mm, Height=0.45mm, Lead Free="Lead Free", Length=2mm, Military Standard=Not, Mount="Surface Mount", Number of Pins=2, Packaging="Tape and Reel", Radiation Hardening=No, Supplier 1=Mouser, Termination=SMD/SMT, Voltage Rating (DC)=150V, Weight=0.000194oz, Width=1.25mm
R32: library part ERJ-6ENF5622V, "56K Ohm Resistor", Supplier Part Number 1=667-ERJ-6ENF5622V, Supplier 1=Mouser
R33: library part CRCW08056K80FKEA, "Resistor 6.8K Ohm", Supplier Part Number 1=71-CRCW0805-6.8K-E3, Number of Terminations=2, Supplier 1=Mouser
R34: library part CRCW0805100RFKEB, "Resistor 100 Ohm", Supplier Part Number 1=71-CRCW0805100RFKEB, Number of Terminations=2, Supplier 1=Mouser
R36: library part FC4L110R005FER, "Resistor 0R005 5W", Manufacturer_Name=Ohmite, Supplier Part Number 1=588-FC4L110R005FER, Height=0.7mm, Manufacturer_Part_Number=FC4L110R005FER, Supplier 1=Mouser
R37: library part PWR163S-25-3000FE, "Resistor 300 Ohm / 25W", Manufacturer_Name=Bourns, Supplier Part Number 1=652-PWR163S253000FE, Datasheet Link=https://componentsearchengine.com/Datasheets/1/PWR163S-25-3000FE.pdf, Height=2.79mm, Manufacturer_Part_Number=PWR163S-25-3000FE, Supplier 1=Mouser
TP1 TP2 TP3 TP4 TP5 TP6 TP7 TP8 TP12 TP13: library part "Test Point", "Test Point 1mm by 1mm"

## Via types
v1: diameter 0.6, hole 0.3, Top Layer to Bottom Layer, 196 vias

## Nets (pads, with @x,y where several pads share a name; then routed paths per layer and width w, separated by ;. In a path a pad name is that pad's centre, name@x,y a point inside that pad or via, vN(x,y) a via of type N, cw(c..) or ccw(c..) an arc to the next point about the centre after c; other vN are vias at no path point)
5V: C29.2 C32.2 C33.2 C46.2 C47.2 D1.2 D2.2 IC4.1 IC5.1 IC6.6 IC7.5 J1.8 LED1.2 P2.2 | length 150.1
  Top Layer w0.254: IC4.1 9.75,7.56 C29.2 9.49,7.085 11.202,5.373 21.123,5.373 21.5,5.75 ; D2.2 20.281,60 21.522,58.759 21.522,57.916 22.615,56.823 24.435,56.823 24.627,57.015 24.627,57.127 24.95,57.45 IC5.1 24.95,58.037 25.123,58.21 C32.2 27.215,58.21 27.568,58.563 27.568,59.224 27.75,59.406 v1(27.75,59.5) ; P2.2 P2.2@43.074,53.406 ; C33.2@43.074,21.851 C33.2 ; 43.074,23.75 43.134,23.69 ; 46.75,53.48 LED1.2 ; C47.2 48.672,23.69 48.893,23.911 48.893,23.956 49.115,24.177 50.823,24.177 51.45,23.55 IC7.5 ; C46.2 60.576,47.81 61.152,48.386 61.152,48.437 IC6.6@61.35,48.635
  Top Layer w0.5: D1.2 20.85,7.05 20.85,6.4 21.5,5.75 28.25,5.75 33,10.5 33,20.75 39.25,27 43.074,27 ; P2.2 46.75,53.48 53.615,53.48 59.285,47.81 C46.2 ; 43.134,23.69 C47.2 ; C33.2 43.65,21.275 J1.8 ; IC6.6@61.35,48.635 IC6.6
  Top Layer w1: C33.2@43.074,21.851 43.074,23.75 43.074,27 P2.2@43.074,53.406
  Bottom Layer w0.5: v1(27.75,59.5) 33.77,53.48 P2.2
Amp_out: IC6.5 R31.2 | length 32.6
  Top Layer w0.254: R31.2 46.25,27.929 v1(46.25,30) ; v1(59.695,49.873) 59.727,49.905 IC6.5
  Bottom Layer w0.254: v1(46.25,30) 46.25,41 55.123,49.873 v1(59.695,49.873)
"Current ADC Output": C50.2 J2.4 R34.1 | length 23.3
  Top Layer w0.254: J2.4 57.437,6.627 57.437,18.324 58.5,19.387 R34.1 60.24,22.525 C50.2
GND: C10.1 C11.1 C12.1 C13.1 C29.1 C30.1 C31.1 C32.1 C33.1 C34.2 C35.2 C36.2 C37.2 C38.1 C39.1 C44.1 C45.1 C46.1 C47.1 C48.1 C49.1 C50.1 IC4.2 IC5.2 IC6.2 IC7.2 J1.9 J2.1 M3.1-2-3 M4.1-2-3 P2.1 P3.1 P4.1 R1.2 R19.1 R20.1 R21.2 R22.2 R32.1 R35.2 R37.1 TP7.1 TP8.1 | length 53.4
  Top Layer w0.254: v1(11.3,6.377) 11.3,7.11 10.757,7.653 10.757,8.893 IC4.2 10.7,9.25 11.023,9.573 11.023,9.685 11.215,9.877 12.498,9.877 12.985,9.39 C30.1 13.415,9.39 13.768,9.037 13.768,8.207 14.675,7.3 R19.1 14.675,7.1 15.775,6 v1(16,6) ; v1(13,12.75) 13.075,12.825 R21.2 ; C31.1 20.715,57.81 22.156,56.369 24.623,56.369 24.844,56.59 C32.1 28.59,56.59 28.645,56.645 28.762,56.645 29.156,56.25 29.156,56.244 v1@29.2,56.2 ; IC5.2 24,58.05 24.323,58.373 24.323,58.485 24.736,58.898 24.973,58.898 25.975,59.9 R20.1 ; R22.2 28.525,54.975 v1(29.25,54.25) ; v1(39.988,28.512) v1@40,28.5 ; C33.1 41.11,21.465 J1.9 ; v1@46.25,25.5 46.44,25.31 C47.1 48.672,25.31 48.893,25.089 48.893,25.044 49.115,24.823 49.985,24.823 50.177,25.015 50.177,25.127 50.5,25.45 IC7.2 ; R35.2 52.57,21.18 v1(53,20.75) ; R1.2 v1(53.25,56.75) ; C49.1 55.5,27.5 55.75,27.75 v1(56,27.75) ; v1(58.841,45.341) 58.932,45.432 58.932,45.837 59.285,46.19 C46.1 ; v1(60.25,29.25) 60.475,29.475 R32.1 ; v1(61.644,53.637) 61.644,52.966 C45.1 ; C48.1 61.825,23.749 ; C50.1 61.825,22.56 61.825,23.749 ; v1(63.25,23.25) 62.751,23.749 61.825,23.749 ; IC6.2 68.615,47.365 v1(68.75,47.5) ; v1(67.25,54) 67.3,53.95 C44.1
  Bottom Layer w0.254: TP8.1 v1(29.25,52)
  other v1: 33.25,4.25 0.75,9 44.75,9.25 67,10 74.75,10 82.5,10 27.155,10.345 0.75,15 34.5,15.75 67,23.25 74.625,23.25 82.25,23.25 46.345,25.405 -7,26.75 -7,32 57.75,32 0.75,32.25 33.25,32.25 49.25,32.25 -7,38 92.25,38.75 87,39 29.25,41.75 33.25,42.5 29.25,43.25 87,44.25 92.25,44.25 29.25,45 55.5,46.25 29.25,47 47.25,47.25 0.75,47.75 29.25,48.75 29.25,50.25 33.25,51 57,55.25 29.25,56 33.25,57.75 29.405,58.905 0.75,60.5 29.25,61.25 54.75,62.25 29.25,63.75 33.25,65 83,70.5
In+: R28.2 R36.3 TP13.1 | length 5.3
  Top Layer w0.254: v1(60.5,55) R28.2@63.225,55 ; R36.3 62.673,56.402 62.673,55.552 R28.2@63.225,55 ; R28.2 63.475,55 R28.2@63.225,55
In-: R29.2 R36.4 TP12.1 | length 5.6
  Top Layer w0.254: R29.2 65.629,55 R29.2@65.804,55 ; R36.4 66.127,56.402 66.127,55.323 R29.2@65.804,55 ; v1(69,55) R29.2@65.804,55
NetC24_2: C24.2 D1.1 IC2.1 | length 4.7
  Top Layer w0.254: C24.2 18.2,7.623 18.623,7.2 D1.1 19.25,7.2 19.673,7.623 19.673,8.073 20.25,8.65 IC2.1
NetC25_2: C25.2 IC2.4 R2.1 | length 4.1
  Top Layer w0.254: IC2.4 24.56,11.45 C25.2 24.9,11.51 R2.1
NetC26_2: C26.2 IC3.4 R3.1 | length 3.5
  Top Layer w0.254: C26.2 R3.1 11.325,55.25 IC3.4
NetC27_2: C27.2 D2.1 IC3.1 | length 9.1
  Top Layer w0.254: IC3.1 15.925,57.75 C27.2@16.985,56.69 ; v1(15.75,56.5) 15.844,56.5 16.034,56.69 C27.2@16.985,56.69 ; v1(16.25,60) D2.1 ; C27.2 C27.2@16.985,56.69
  Bottom Layer w0.254: v1(15.75,56.5) 15.75,59.406 16.25,59.906 v1(16.25,60)
NetC30_2: C30.2 IC4.4 R15.1 | length 3.5
  Top Layer w0.254: IC4.4 12.545,11.45 12.985,11.01 C30.2 14.735,11.01 R15.1
NetC31_2: C31.2 IC5.4 R16.1 | length 3.9
  Top Layer w0.254: C31.2 R16.1 22.877,54.975 23.05,55.148 IC5.4
NetC43_1: C43.1 C44.2 IC6.1 R29.1 | length 10.2
  Top Layer w0.254: R29.1 65.604,51.894 C43.1 C43.1@65.31,51.543 ; IC6.1 66.775,46.095 65.31,47.56 C43.1@65.31,51.543 ; C44.2 65.663,51.19 C43.1@65.31,51.543
NetC43_2: C43.2 C45.2 IC6.8 R28.1 | length 10.1
  Top Layer w0.254: IC6.8 62.225,46.095 63.69,47.56 C43.2@63.69,51.543 ; C45.2 63.337,51.19 C43.2@63.69,51.543 ; R28.1 63.5,51.79 C43.2 C43.2@63.69,51.543
NetC49_2: C49.2 R31.1 R33.2 | length 6.6
  Top Layer w0.254: R31.1 47.975,27.954 48.777,28.756 50.19,28.756 50.431,28.514 50.431,27.946 50.673,27.704 R33.2 51.734,27.5 C49.2
NetC51_1: C51.1 IC7.4 R26.1 R35.1 | length 9.3
  Top Layer w0.254: R35.1 49.525,21.28 R35.1@49.55,21.305 ; IC7.4 R35.1@49.55,21.305 ; R26.1 55.424,22.95 C51.1 52.413,22.95 51.851,22.389 50.634,22.389 R35.1@49.55,21.305
NetIC2_3: IC2.3 R9.2 | length 2.1
  Top Layer w0.254: IC2.3 22.15,7.775 22.725,7.2 R9.2
NetIC2_5: IC2.5 R5.1 | length 4.2
  Top Layer w0.254: IC2.5 20.25,11.75 20.423,11.923 21,11.923 23.026,13.949 R5.1
NetIC3_3: IC3.3 R10.2 | length 2.3
  Top Layer w0.254: R10.2 13.05,59.975 IC3.3
NetIC3_5: IC3.5 R6.1 | length 4.5
  Top Layer w0.254: R6.1 13.025,52.351 13.025,53.025 14.95,54.95 IC3.5
NetIC4_3: IC4.3 R19.2 | length 2.2
  Top Layer w0.254: IC4.3 11.65,8.65 12.177,8.123 12.177,7.748 R19.2
NetIC4_5: IC4.5 R17.1 | length 3.1
  Top Layer w0.254: R17.1 9.442,13.649 9.442,12.815 9.75,12.506 IC4.5
NetIC5_3: IC5.3 R20.2 | length 2.8
  Top Layer w0.254: IC5.3 23.223,57.923 23.223,58.335 23.565,58.677 23.858,58.677 24.025,58.844 R20.2
NetIC5_5: IC5.5 R18.1 | length 4.6
  Top Layer w0.254: R18.1 22.825,52.351 22.825,52.825 24.95,54.95 IC5.5
NetIC7_3: IC7.3 R33.1 | length 2
  Top Layer w0.254: IC7.3 49.55,27.675 R33.1
NetLED1_1: LED1.1 R1.1 | length 3
  Top Layer w0.254: LED1.1 49.7,56.8 R1.1
NetM1_4: M1.4 R6.2 R13.1 TP2.1 | length 9
  Top Layer w0.254: M1.4 15.45,51.724 R6.2 15.526,53.501 17.2,55.175 R13.1
  other v1: 15.5,49
NetM2_4: M2.4 R5.2 R12.1 TP1.1 | length 7.5
  Top Layer w0.254: R12.1 R12.1 R12.1@18.427,14.2 ; M2.4 18.75,14.523 R12.1@18.427,14.2 ; R5.2 R12.1@18.427,14.2
  other v1: 18.75,17.75
NetM3_4: M3.4 R18.2 R22.1 TP6.1 | length 8.9
  Top Layer w0.254: M3.4 25.45,49 ; v1(27,48.5) 26.5,49 25.45,49 ; R22.1 26.452,52.477 25.877,52.477 25.326,51.926 R18.2 25.45,51.676 25.45,49
NetM4_4: M4.4 R17.2 R21.1 TP5.1 | length 8.7
  Top Layer w0.254: M4.4 10.25,16.5 v1(10.75,16) 11.427,15.323 11.427,14.715 R17.2 13.009,14.2 13.309,14.5 13.925,14.5 R21.1
"Op-Amp Out": C51.2 IC7.1 R26.2 R34.2 | length 7.6
  Top Layer w0.254: IC7.1 52.335,25.7 53.464,24.57 C51.2 55.754,24.57 R26.2 R34.2
P+: C10.2 C11.2 C12.2 C13.2 C34.1 C35.1 C36.1 M1.5-6-7-8 M2.5-6-7-8 P3.2 R2.2 R3.2 R36.2 | length 10.6
  Top Layer w0.254: 24.5,17 24.9,16.6
  Top Layer w0.4: R2.2 24.9,16.6
  Top Layer w2: C35.1 43,70.391 P3.2
  other v1: 22.5,17 23.75,17 3.75,17.75 5,17.75 6.25,17.75 22.5,18.25 23.75,18.25 22.5,19.75 23.75,19.75 20.025,19.925 20.9,19.925 20.025,20.7 20.875,20.725 22.5,21 23.75,21 25,21.25 26.25,21.25 20.85,21.475 20.025,21.5 23.75,22.25 25,22.25 26.25,22.25 22.5,22.5 22.5,23.5 23.75,23.5 25,23.5 26.25,23.5 14.175,45.2 13.35,45.225 13.325,45.975 14.175,46 4.25,46.25 5.5,46.25 6.75,46.25 8,46.25 9.25,46.25 10.5,46.25 13.3,46.775 14.175,46.775 4.25,47.25 5.5,47.25 6.75,47.25 8,47.25 9.25,47.25 10.5,47.25 4.25,48.25 5.5,48.25 6.75,48.25 8,48.25 9.25,48.25 10.5,48.25
P-: C37.1 L2.1 R36.1
"Power In 1": C1.1 C2.1 C4.1 C6.1 P1.1
"Rectifier Vin 1": C3.1 C5.1 C7.1 C9.1 C24.1 C25.1 IC2.2 M2.1-2-3 M4.5-6-7-8 P1.2 R9.1 R12.2 R15.2 TP3.1 | length 23.2
  Top Layer w0.254: R15.2 15.15,9.225 16.435,10.51 C24.1 R12.2 18.3,12.025 19.802,10.523 20.039,10.523 21.027,9.535 21.027,9.123 21.073,9.123 21.373,9.423 21.373,9.535 21.715,9.877 22.83,9.877 23.017,9.69 C25.1 24.7,7.125 R9.1 ; 16.25,17.25 16.435,17.065
  Top Layer w0.5: 16.435,10.51 16.435,17.065
  other v1: 11.525,19.925 12.4,19.925 11.525,20.7 12.375,20.725 12.35,21.475 11.525,21.5 13.842,25.746
"Rectifier Vin 2": C1.2 C2.2 C3.2 C4.2 C5.2 C6.2 C7.2 C9.2 C26.1 C27.1 IC3.2 M1.1-2-3 M3.5-6-7-8 R10.1 R13.2 R16.2 TP4.1 | length 18.6
  Top Layer w0.254: C26.1 11.215,58.51 12.091,57.634 12.091,57.346 12.615,56.823 13.485,56.823 13.827,57.165 13.827,57.577 IC3.2 14,58.925 R10.1@14.975,59.9 ; R10.1 R10.1@14.975,59.9 ; 18.75,52.75 18.75,56.975 17.415,58.31 C27.1 16.847,58.663 16.212,58.663 R10.1@14.975,59.9
  Bottom Layer w0.254: v1(20.75,43.25) v1(22,43.25) ; 22.5,43.25 TP4.1
  other v1: 13,33 14.25,33 15.5,33 16.75,33 18,33 19.5,33 21,33 22.25,33 23.75,33 25.25,33 27,33 9.5,41.75 11.25,41.75 13,41.75 15.25,41.75 17.25,41.75 19,41.75 20.75,41.75 22,41.75 9.5,43.25 11.25,43.25 13,43.25 15.25,43.25 17.25,43.25 19,43.25 17.25,44.75 19,44.75 20.75,44.75 22,44.75 24.175,45.2 23.35,45.225 23.325,45.975 24.175,46 23.3,46.775 24.175,46.775
Vout: C38.2 C39.2 L2.2 P4.2 R30.2 R37.2 | length 15.9
  Top Layer w0.254: R37.2 62.183,41 61.5,40.317 61.5,39.25 60.5,38.25 60.5,31 60.75,30.75 62.475,30.75 63.75,29.475 R30.2
"Vout ADC": C48.2 J2.3 R30.1 R32.2 | length 30.1
  Top Layer w0.254: J2.3 56.35,4.898 63.877,12.425 63.877,24.64 C48.2 64.175,27.35 R30.1 R32.2
pads on no net: IC6.3 IC6.4 IC6.7 J1.1 J1.2 J1.3 J1.4 J1.5 J1.6 J1.7 J1.10 J2.2 J2.5 J2.6 J2.7 J2.8 J2.9 J2.10 M5.1 M6.1 M7.1 M8.1 R37.3
copper on no net:
  other v1: 51.747,34.96 53.247,34.96 54.747,34.96 56.247,34.96 57.747,34.96 59.047,34.96 51.747,36.46 53.247,36.46 54.747,36.46 56.247,36.46 57.747,36.46 59.047,36.46 51.747,38.46 53.247,38.46 54.747,38.46 56.247,38.46 57.747,38.46 59.047,38.46 51.747,40.46 53.247,40.46 54.747,40.46 56.247,40.46 57.747,40.46 59.047,40.46 51.747,41.96 53.247,41.96 54.747,41.96 56.247,41.96 57.747,41.96 59.047,41.96

## Polygon pours and split planes (outlines as drawn)
GND on Top Layer "GND_L01_P032" (solid, remove dead copper, pour order 32): 85.25,37.5 85.25,47 95.75,47 95.75,37.5
GND on Top Layer "GND_L01_P030" (solid, remove dead copper, pour order 30): 7.5,20.214 7.509,20.205 10.75,20.205 10.75,23.375 8.163,25.962 7.5,25.962
GND on Top Layer "GND_L01_P028" (solid, remove dead copper, pour order 28): 27.5,0 27.5,5.25 27,4.75 7.5,4.75 7.5,51 7.75,51.25 7.75,72.75 85,72.75 85,80 0,80 0,40.5 -11.5,40.5 -11.5,24 0,24 0,0
P+ on Top Layer "P+_L01_P010" (solid, remove dead copper, pour order 10): 27.5,25 27.5,16.25 19.5,16.25 19.25,16.5 19.25,25
GND on Top Layer "GND_L01_P022" (solid, remove dead copper, pour order 22): 24.95,46.495 24.955,46.5 26.25,46.5 26.25,50.5 28,52.25 28,59.25 25.25,59.25 25.25,66.25 30,66.25 30,41 25.25,41 24.95,41.3
P+ on Top Layer "P+_L01_P019" (solid, remove dead copper, pour order 19): 48.25,66.75 48.25,62 50,62 50.25,62.25 50.25,64 58.75,64 58.75,66.75
P+ on Top Layer "P+_L01_P013" (solid, remove dead copper, pour order 13): 8.25,44.25 15,44.25 15,50 11.75,50 11.75,54.25 8.25,54.25
P+ on Top Layer "P+_L01_P012" (solid, remove dead copper, pour order 12): 3.5,50.75 8.25,50.75 8.25,43.75 3.5,43.75
P+ on Top Layer "P+_L01_P011" (solid, remove dead copper, pour order 11): 2.75,20 7.25,20 7.25,15.5 2.75,15.5
"Rectifier Vin 2" on Top Layer "RECTIFIER_VIN_2_L01_P009" (solid, remove dead copper, pour order 9): 16.5,54 21.25,54 21.25,49.5 24.75,49.5 24.75,41 8.75,41 8.75,44 14.25,44 14.95,44.7 14.95,46.495 16.495,46.495 16.5,46.5
"Rectifier Vin 1" on Top Layer "RECTIFIER_VIN_1_L01_P008" (solid, remove dead copper, pour order 8): 7.5,33 11.5,33 11.5,29.5 12.25,28.75 25,28.75 25,25 24.75,25.25 25,25 20,25 20,23 19.25,22.25 19.25,20.205 17.705,20.205 17.5,20 17.5,16.25 11.25,16.25 11,16.5 11,23.5 10.25,23.5 7.5,26.25
"Rectifier Vin 2" on Top Layer "RECTIFIER_VIN_2_L01_P006" (solid, remove dead copper, pour order 6): 28.75,37.25 12.75,37.25 12.75,37 12.25,36.5 12.25,29.5 28.75,29.5
"Power In 1" on Top Layer "POWER_IN_1_L01_P005" (solid, remove dead copper, pour order 5): 11,39.75 12,40.75 28.75,40.75 28.75,37.5 12.75,37.5 11.5,36.25 11.5,33.75 -5,33.75 -5,39.75
P+ on Top Layer "P+_L01_P004" (solid, remove dead copper, pour order 4): 22,72.5 63.25,72.5 63.25,58.75 58.75,58.75 58.75,66.75 22,66.75
P- on Top Layer "P-_L01_P003" (solid, remove dead copper, pour order 3): 65.75,58.75 65.75,72.5 85,72.5 85,61.25 68.75,61.25 68.75,58.75
GND on Top Layer "GND_L01_P002" (solid, remove dead copper, pour order 2): 61,37.5 95.75,37.5 95.75,31.25 61,31.25
Vout on Top Layer "VOUT_L01_P000" (solid, remove dead copper, pour order 0): 70,56.25 85,56.25 85,38.75 72.5,38.75 72.25,38.5 61,38.5 61,43.75 70,43.75
GND on Bottom Layer "GND_L04_P025" (solid, remove dead copper, pour order 25): 85,72.75 85,80 0,80 0,0 27.5,0 27.5,72.75
P+ on Bottom Layer "P+_L04_P018" (solid, remove dead copper, pour order 18): 28.75,15.5 28.75,28.75 30,30 30,66.75 46.25,66.75 46.25,72.5 8,72.5 8,51.25 7.75,51 3.5,51 3.5,20.75 2.75,20 2.75,15.5
GND on Bottom Layer "GND_L04_P027" (solid, remove dead copper, pour order 27): 85,72.5 85,0 28.75,0 28.75,72.25 29,72.5
GND on Bottom Layer "GND_L04_P031" (solid, remove dead copper, pour order 31): 85,47 95.75,47 95.75,30.5 85,30.5
GND on Bottom Layer "GND_L04_P029" (solid, remove dead copper, pour order 29): 0,40.5 -11.5,40.5 -11.5,24 0,24
"Rectifier Vin 2" on Bottom Layer "RECTIFIER_VIN_2_L04_P017" (solid, remove dead copper, pour order 17): 22.5,29.5 22.5,45.75 22.25,46 15,46 15,43.25 13,41.25 7.5,41.25 7.5,29.5
"Rectifier Vin 2" on Ground 2 (split plane): 15.398,43.458 15.398,37.5 15.406,37.461 15.428,37.428 15.678,37.178 15.711,37.156 15.75,37.148 28.648,37.148 28.648,29.602 7.746,29.602 7.822,29.678 7.844,29.711 7.852,29.75 7.852,44.148 14.708,44.148
P+ on Ground 2 (split plane): 63.148,66.852 30,66.852 29.961,66.844 29.928,66.822 29.906,66.789 29.898,66.75 29.898,30.078 29.889,30.072 29.867,30.039 29.86,30.004 28.705,28.85 28.694,28.833 28.678,28.822 28.656,28.789 28.648,28.75 28.648,15.563 15.578,15.563 15.572,15.572 15.539,15.594 15.5,15.602 2.852,15.602 2.852,72.398 63.148,72.398
GND on Ground 2 (split plane): 84.49,47 84.499,46.9 84.528,46.805 84.576,46.716 84.639,46.639 84.716,46.576 84.805,46.528 84.9,46.499 85,46.49 95.24,46.49 95.24,31.01 85,31.01 84.9,31.001 84.805,30.972 84.716,30.924 84.639,30.861 84.576,30.784 84.528,30.695 84.499,30.6 84.49,30.5 84.49,0.51 28.833,0.51 28.833,15.444 28.844,15.461 28.852,15.5 28.852,28.708 30.033,29.889 30.049,29.912 30.072,29.928 30.094,29.961 30.102,30 30.102,66.648 58.648,66.648 58.648,58.75 58.656,58.711 58.678,58.678 58.711,58.656 58.75,58.648 69.708,58.648 69.898,58.458 69.898,43.852 61,43.852 60.961,43.844 60.928,43.822 60.906,43.789 60.898,43.75 60.898,31.25 60.906,31.211 60.928,31.178 60.961,31.156 61,31.148 85,31.148 85.039,31.156 85.072,31.178 85.094,31.211 85.102,31.25 85.094,31.289 85.072,31.322 85.039,31.344 85,31.352 61.102,31.352 61.102,43.648 70,43.648 70.039,43.656 70.072,43.678 70.094,43.711 70.102,43.75 70.102,58.5 70.094,58.539 70.072,58.572 69.822,58.822 69.789,58.844 69.75,58.852 58.852,58.852 58.852,66.648 63.25,66.648 63.289,66.656 63.322,66.678 63.344,66.711 63.352,66.75 63.352,72.5 63.344,72.539 63.322,72.572 63.289,72.594 63.25,72.602 2.75,72.602 2.711,72.594 2.678,72.572 2.656,72.539 2.648,72.5 2.648,15.5 2.656,15.461 2.678,15.428 2.711,15.406 2.75,15.398 15.422,15.398 15.428,15.389 15.461,15.367 15.5,15.359 28.629,15.359 28.629,0.51 0.51,0.51 0.51,24 0.501,24.1 0.472,24.195 0.424,24.284 0.361,24.361 0.284,24.424 0.195,24.472 0.1,24.501 0,24.51 -10.99,24.51 -10.99,39.99 0,39.99 0.1,39.999 0.195,40.028 0.284,40.076 0.361,40.139 0.424,40.216 0.472,40.305 0.501,40.4 0.51,40.5 0.51,79.49 84.49,79.49
P+ on Ground 1 (split plane): 10.913,45.867 3.617,45.867 3.617,48.648 10.913,48.648
P+ on Ground 1 (split plane): 27.398,16.352 19.602,16.352 19.602,24.898 27.398,24.898
GND on Ground 1 (split plane): 84.49,47 84.499,46.9 84.528,46.805 84.576,46.716 84.639,46.639 84.716,46.576 84.805,46.528 84.9,46.499 85,46.49 95.24,46.49 95.24,31.01 85.102,31.01 85.102,31.25 85.094,31.289 85.072,31.322 85.039,31.344 85,31.352 61.102,31.352 61.102,37.398 62.5,37.398 62.539,37.406 62.572,37.428 62.594,37.461 62.602,37.5 62.594,37.539 62.572,37.572 62.539,37.594 62.5,37.602 61,37.602 60.961,37.594 60.928,37.572 60.906,37.539 60.898,37.5 60.898,31.25 60.906,31.211 60.928,31.178 60.961,31.156 61,31.148 84.898,31.148 84.898,31 84.805,30.972 84.716,30.924 84.639,30.861 84.576,30.784 84.528,30.695 84.499,30.6 84.49,30.5 84.49,0.51 30.102,0.51 30.102,1.25 30.102,13.75 30.102,28.708 31.322,29.928 31.344,29.961 31.352,30 31.352,66.148 58.648,66.148 58.648,61.5 58.648,58.25 58.648,58.127 58.656,58.088 58.678,58.054 58.711,58.032 58.75,58.025 58.789,58.032 58.812,58.048 58.834,58.032 58.873,58.025 69.831,58.025 69.898,57.958 69.898,43.852 61,43.852 60.961,43.844 60.928,43.822 60.906,43.789 60.898,43.75 60.898,39.25 60.906,39.211 60.928,39.178 60.961,39.156 61,39.148 62.5,39.148 62.539,39.156 62.572,39.178 62.594,39.211 62.602,39.25 62.594,39.289 62.572,39.322 62.539,39.344 62.5,39.352 61.102,39.352 61.102,43.648 70,43.648 70.039,43.656 70.072,43.678 70.094,43.711 70.102,43.75 70.102,58 70.094,58.039 70.072,58.072 69.946,58.199 69.912,58.221 69.873,58.228 58.916,58.228 58.852,58.292 58.852,61.5 58.852,66.25 58.844,66.289 58.822,66.322 58.789,66.344 58.75,66.352 31.25,66.352 31.211,66.344 31.178,66.322 31.156,66.289 31.148,66.25 31.148,30.042 29.928,28.822 29.906,28.789 29.898,28.75 29.898,13.75 29.898,1.25 29.898,0.51 0.51,0.51 0.51,24 0.501,24.1 0.472,24.195 0.424,24.284 0.361,24.361 0.284,24.424 0.195,24.472 0.1,24.501 0,24.51 -10.99,24.51 -10.99,39.99 0,39.99 0.1,39.999 0.195,40.028 0.284,40.076 0.361,40.139 0.424,40.216 0.472,40.305 0.501,40.4 0.51,40.5 0.51,79.49 84.49,79.49

## Other copper
Bottom Layer:
  pour cut-out: 30,66.5 65.75,66.5 65.75,58.75 70,58.75 70,31.25 85,31.25 85,31 69.75,31 69.75,58.5 65.5,58.5 65.5,66.25 30,66.25
Ground 1 (plane layer: these items are gaps in the copper):
  lines w0.2: 3.5,48.711 3.515,48.696 3.515,45.765 11.015,45.765 11.015,48.786 ; 3.5,48.75 11,48.75 6.5,48.75 ; 58.75,58.127 58.75,61.5 ; 62.5,37.5 61,37.5 61,31.25 85,31.25 85,0 30,0 30,1.25 30,13.75 30,28.75 31.25,30 31.25,66.25 58.75,66.25 58.75,58.25 58.873,58.127 69.873,58.127 70,58 70,43.75 61,43.75 61,39.25 61.75,39.25 62.5,39.25 ; 19.5,16.25 19.5,25 27.5,25 27.5,16.25 19.5,16.25
Ground 2 (plane layer: these items are gaps in the copper):
  lines w0.2: 15.5,15.461 28.711,15.461 28.75,15.5 28.75,28.75 ; 15.5,15.5 2.75,15.5 2.75,72.5 63.25,72.5 63.25,66.75 30,66.75 30,30 ; 28.731,0.019 28.731,15.481 ; 28.777,28.777 29.961,29.961 29.961,30 ; 58.75,66.75 58.75,58.75 69.75,58.75 70,58.5 70,43.75 61,43.75 61,31.25 85,31.25 ; 7.5,29.5 7.75,29.75 7.75,44.25 8.75,44.25 14.75,44.25 15.5,43.5 15.5,37.5 15.75,37.25 21,37.25 28.75,37.25 28.75,29.5 7.5,29.5

## Silkscreen, mask and mechanical layers (free items; w line width, h text height)
Top Overlay:
  text "V+ External" at 44.859,61.75 h0.5
  text "GND" at 45.5,58.734 h0.5 r90
  text "GND" at 45.5,55.234 h0.5 r90
  text "5V" at 44.734,53.25 h0.5
  text "5V" at 44,14.775 h0.5 r90
  text "GND" at 41.25,14.734 h0.5 r90
  text "TinyPICO" at 39.5,8.817 h0.5 r90
  text "Micro-USB Face Here" at 37.5,8.25 h0.5 r90
  text "Current ADC" at 54.75,5.067 h0.5 r90
  text "Vout ADC" at 56.75,4.276 h0.5 r90
  text "GND" at 61.75,3.776 h0.5 r90
Bottom Overlay:
  text "+ve" at 77.45,39.7 h0.8 r270
  text "GND" at 77.45,34.7 h0.8 r270
  text "Power Output" at 82.217,33.95 h0.8 r270
  text "WPT To Coil" at 5.95,29.7 h0.8 r270
  text "WPT Round 2 RX" at 27.05,3.7 h0.8
  text "AE" at 23.3,1.45 h0.8
Board Outline:
  the board outline again, w0.25

## Text inside footprints (layer, text, board x,y; h text height)
J1: Top Overlay "1" at 61.62,16.54 h1.02 r180; Top Overlay "10" at 39.25,16.54 h1.02 r180
J2: Top Overlay "1" at 61.62,1.3 h1.02 r180; Top Overlay "10" at 39.25,1.3 h1.02 r180